# Altium PCB Program_Iterface.PcbDoc
Units mm, origin at the board's own origin, x right, y up, seen from the top; angles counter-clockwise.
Board outline 25.91 x 19.3 mm, 2 copper layers (Top Layer, Bottom Layer); 3 components, 10 nets, 26 pads, 2 vias.
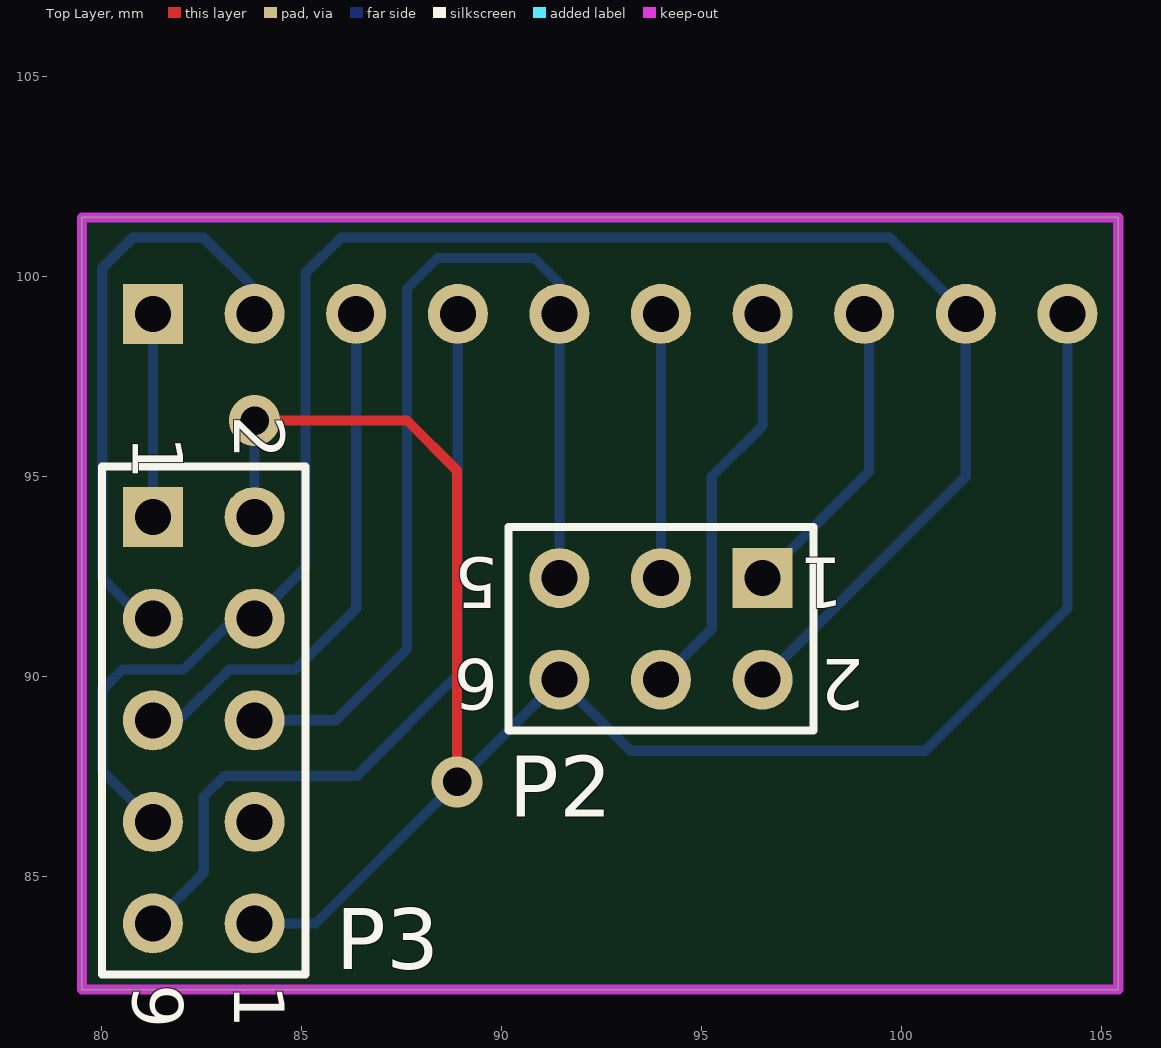
[diagram p0: Top Layer view]
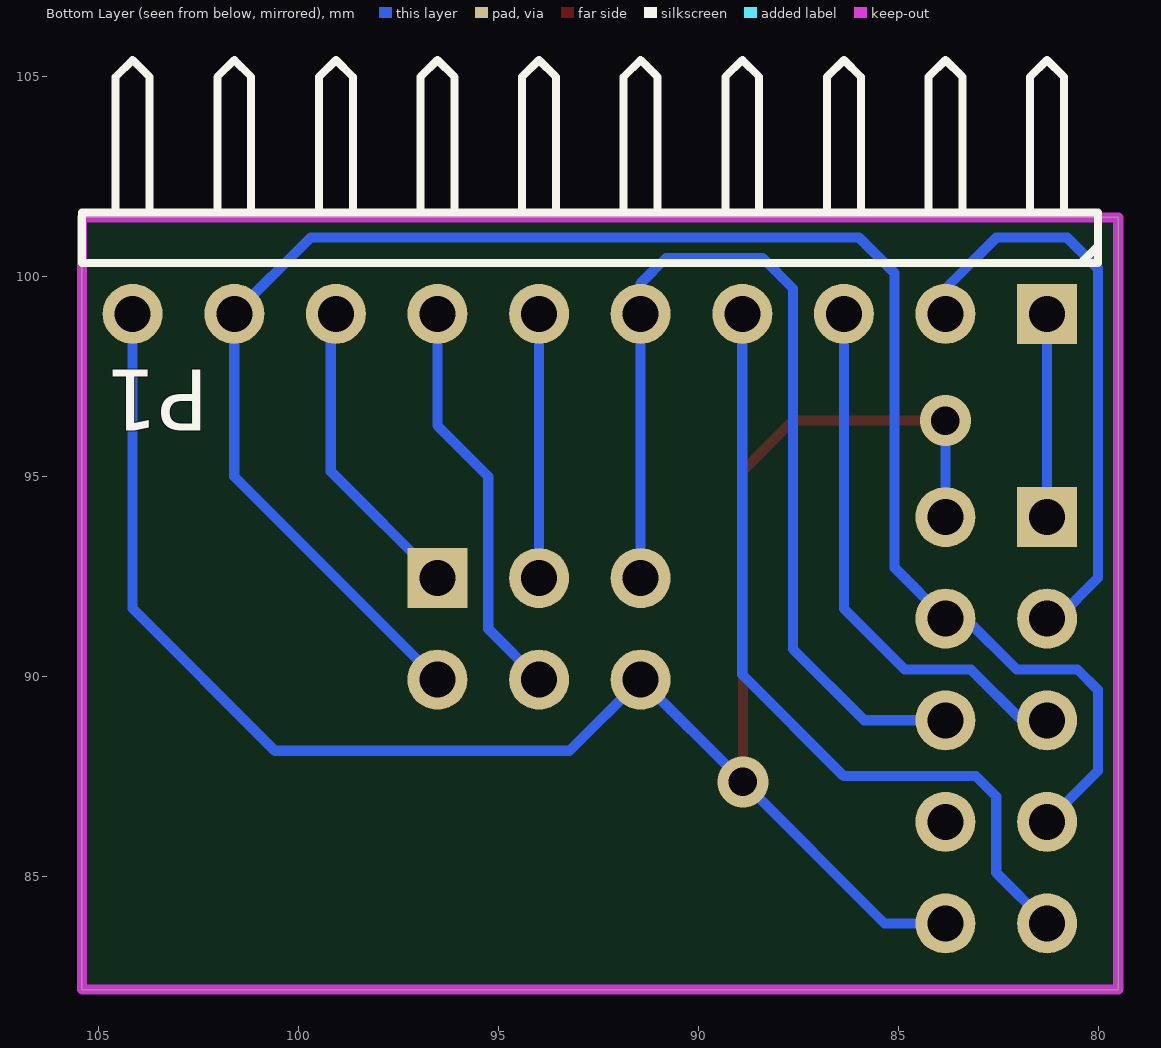
[diagram p1: Bottom Layer view, seen from below]

## Layer stack, top to bottom
Top Layer: signal copper 0.0356
Dielectric: dielectric 0.32, FR-4, Dk 4.8
Bottom Layer: signal copper 0.0356

## Board outline
79.502,82.169 79.502,101.473 105.41,101.473 105.41,82.169

## Design rules (kind name [scope] priority, off if disabled: settings)
Clearance [All] p1: gap=0.254
PolygonConnect [All] p1: connectstyle=Relief reliefconductorwidth=0.254 reliefentries=4 polygonreliefangle="90 Angle"
RoutingVias [All] p1: holewidth=0.711 width=1.27 viastyle="Through Hole" minholewidth=0.711 minwidth=1.27 maxholewidth=0.711 maxwidth=1.27
SilkscreenOverComponentPads [All] p1: minsilkscreentomaskgap=0.254
SolderMaskExpansion [All] p1: expansion=0.102
Width [All] p1: maxlimit=0.254 minlimit=0.254 preferedwidth=0.254
27 further rules are at their usual default settings.

## Components (designator, comment, footprint, x,y, rotation, side; value= is the part's Value field where it differs from the comment)
P1 "Header1" HDR1X10H 81.28,99.06 r0 bottom
P2 "Header 3X2" HDR2X3 96.52,92.456 r180 top
P3 "Header 5X2" HDR2X5 81.28,93.98 r270 top

## Footprints (in the part's own frame and the unit in brackets; to place one, negate y for a bottom-side part, rotate by r counter-clockwise, add the part's x,y. Pads: shape width x height; smd on the part's side, far side on the other; paste and mask are expansions set on the pad)
HDR1X10H [mm] "Connector; Header; 10 Position; Right Angle"
  rect 1.5x1.5 hole 0.9: 1(0,0)
  round 1.5 hole 0.9: 2(2.54,0) 3(5.08,0) 4(7.62,0) 5(10.16,0) 6(12.7,0) 7(15.24,0) 8(17.78,0) 9(20.32,0) 10(22.86,0)
  silkscreen extent -1.27,-6.35 24.13,-1.27
HDR2X3 [mm] "Connector; Header; 3x2 Position"
  rect 1.5x1.5 hole 0.9: 1(0,0)
  round 1.5 hole 0.9: 2(0,2.54) 3(2.54,0) 4(2.54,2.54) 5(5.08,0) 6(5.08,2.54)
  silkscreen extent -1.27,-1.27 6.35,3.81
HDR2X5 [mm] "Connector; Header; 5x2 Position"
  rect 1.5x1.5 hole 0.9: 1(0,0)
  round 1.5 hole 0.9: 2(0,2.54) 3(2.54,0) 4(2.54,2.54) 5(5.08,0) 6(5.08,2.54) 7(7.62,0) 8(7.62,2.54) 9(10.16,0) 10(10.16,2.54)
  silkscreen extent -1.27,-1.27 11.43,3.81

## Part data
P1: library part "Header 10", "Header, 10-Pin"
P2: "Header, 3-Pin, Dual row"
P3: "Header, 5-Pin, Dual row"

## Via types
v1: diameter 1.27, hole 0.711, Top Layer to Bottom Layer, 2 vias

## Nets (pads, with @x,y where several pads share a name; then routed paths per layer and width w, separated by ;. In a path a pad name is that pad's centre, name@x,y a point inside that pad or via, vN(x,y) a via of type N, cw(c..) or ccw(c..) an arc to the next point about the centre after c; other vN are vias at no path point)
GND: P1.10 P2.6 P3.2 P3.10 | length 47.7
  Top Layer w0.254: v1(83.82,96.393) 87.63,96.393 88.883,95.14 v1(88.883,87.359)
  Bottom Layer w0.254: P3.10 85.344,83.82 v1(88.883,87.359) P2.6 93.218,88.138 100.584,88.138 104.14,91.694 P1.10 ; P3.2 v1@83.82,95.885
MISO: P1.8 P2.1 | length 7.6
  Bottom Layer w0.254: P2.1 99.187,95.123 P1.8@99.187,98.933
MOSI: P1.7 P2.4 | length 10.2
  Bottom Layer w0.254: P2.4 95.25,91.186 95.25,94.996 96.52,96.266 P1.7
RESET: P1.5 P2.5 P3.6 | length 25.3
  Bottom Layer w0.254: P3.6 85.852,88.9 87.63,90.678 87.63,99.695 88.392,100.457 90.805,100.457 91.44,99.822 P1.5 P2.5
SCK: P1.6 P2.3 | length 6.6
  Bottom Layer w0.254: P2.3 P1.6
TCK: P1.1 P3.1 | length 5.1
  Bottom Layer w0.254: P3.1 P1.1
TDI: P1.4 P3.9 | length 20.3
  Bottom Layer w0.254: P3.9 82.55,85.09 82.55,86.995 83.058,87.503 86.36,87.503 88.9,90.043 P1.4
TDO: P1.2 P3.3 | length 14.1
  Bottom Layer w0.254: P3.3 81.026,91.44 80.01,92.456 80.01,100.203 80.772,100.965 82.55,100.965 P1.2@83.82,99.695
TMS: P1.3 P3.5 | length 13.6
  Bottom Layer w0.254: P3.5 81.915,88.9 83.185,90.17 84.836,90.17 86.36,91.694 P1.3
VCC: P1.9 P2.2 P3.4 P3.7 | length 46.5
  Bottom Layer w0.254: P3.7 80.01,87.63 80.01,89.662 80.518,90.17 82.042,90.17 83.312,91.44 P3.4 85.09,92.71 85.09,100.076 85.979,100.965 99.695,100.965 P1.9 101.6,94.996 P2.2
pads on no net: P3.8

## Polygon pours and split planes (outlines as drawn)
GND on Top Layer "Bottom Layer-GND" (solid, remove dead copper, shelved): 79.49,101.485 79.49,82.169 105.41,82.169 105.41,101.485 79.49,101.485
GND on Bottom Layer "Bottom Layer-GND" (solid, remove dead copper, shelved): 79.502,101.473 79.502,82.169 105.41,82.169 105.41,101.473 79.502,101.473

## Keep-outs
Keep-Out Layer:
  the board outline again, w0.254

## Text inside footprints (layer, text, board x,y; h text height)
P2: Top Overlay "6" at 89.916,90.424 h1.27 r180; Top Overlay "5" at 89.916,92.964 h1.27 r180; Top Overlay "2" at 99.06,90.424 h1.27 r180; Top Overlay "1" at 98.552,92.964 h1.27 r180
P3: Top Overlay "10" at 83.312,82.296 h1.27 r270; Top Overlay "9" at 80.772,82.296 h1.27 r270; Top Overlay "1" at 80.772,96.012 h1.27 r270; Top Overlay "2" at 83.312,96.52 h1.27 r270